# Altium PCB PWR612A.PcbDoc (part 1 of 2)
Units mil, origin at the board's own origin, x right, y up, seen from the top; angles counter-clockwise.
Board outline 6150 x 4600 mil, 4 copper layers (Top Layer, MidLayer1, MidLayer2, Bottom Layer), stack 91.2 mil thick; 131 components, 120 nets, 496 pads, 150 vias.
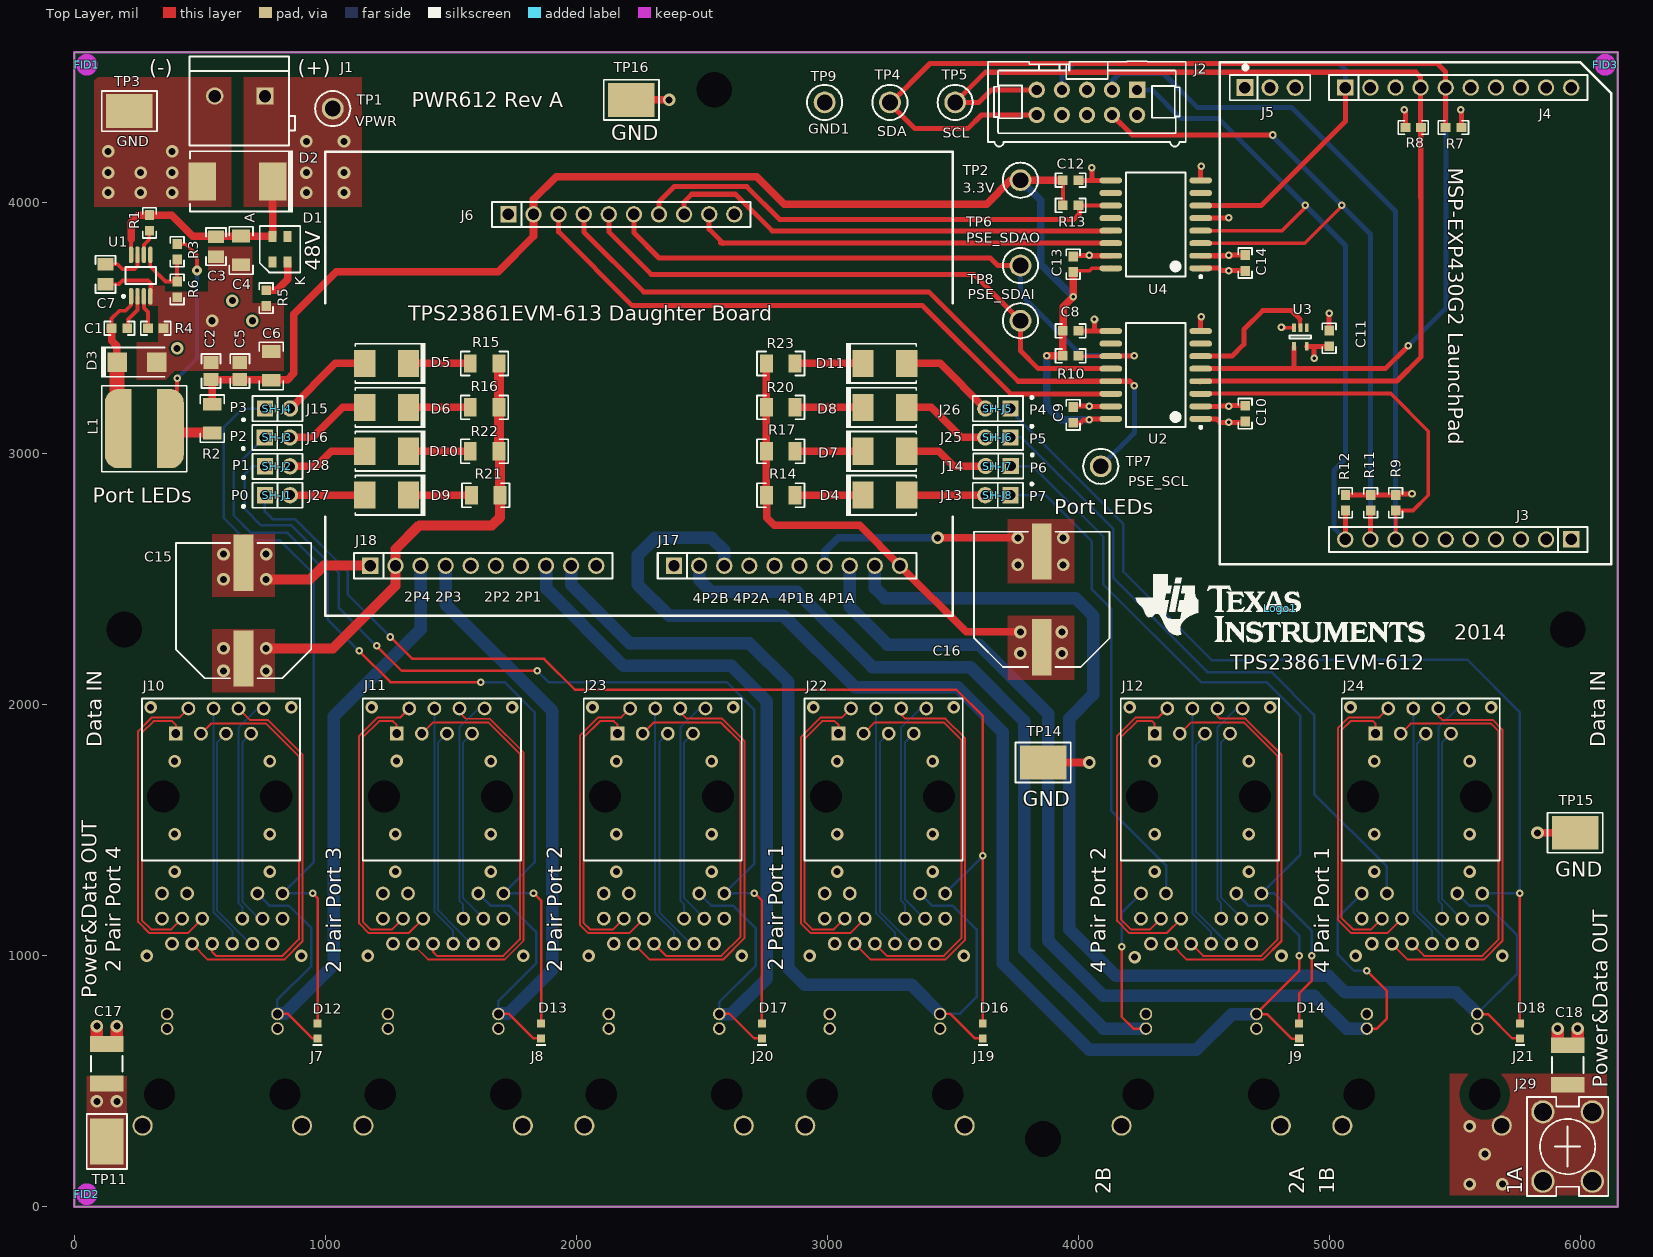
[diagram p0: Top Layer view]
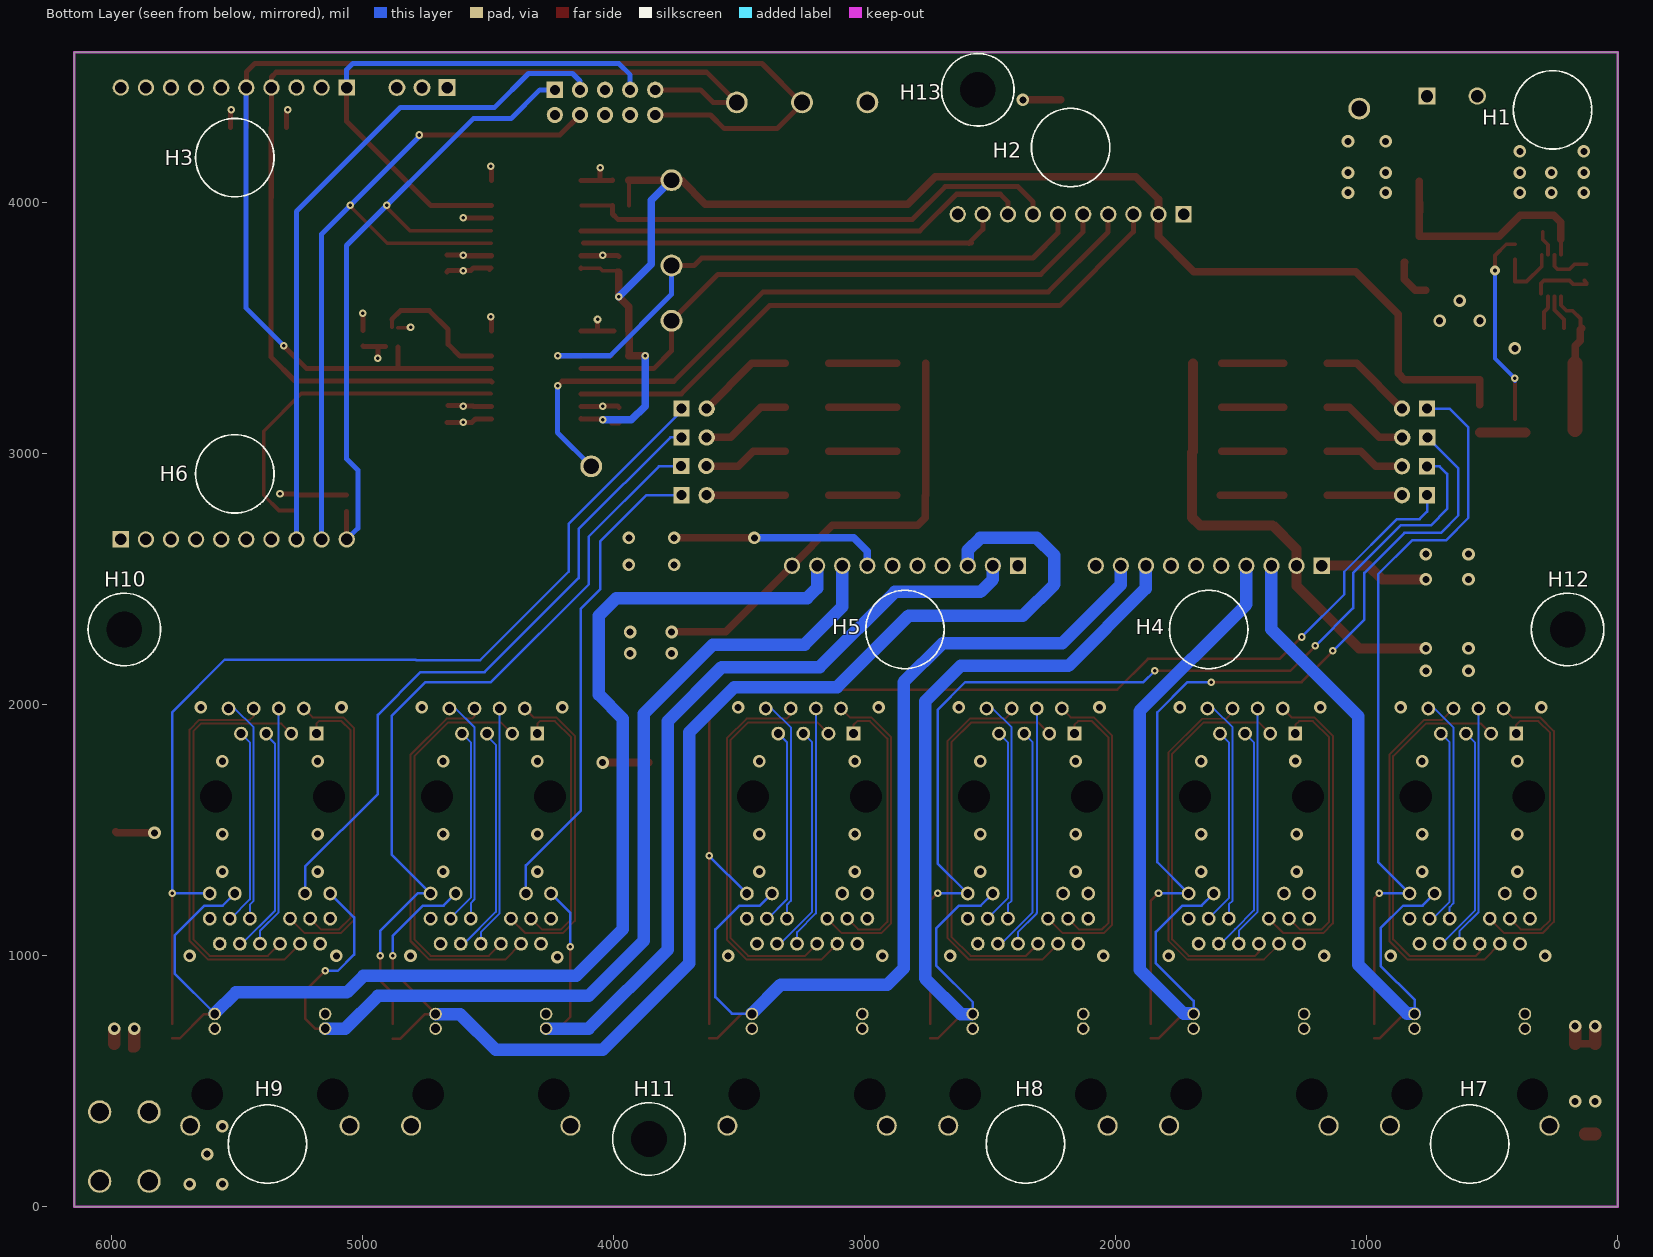
[diagram p1: Bottom Layer view, seen from below]
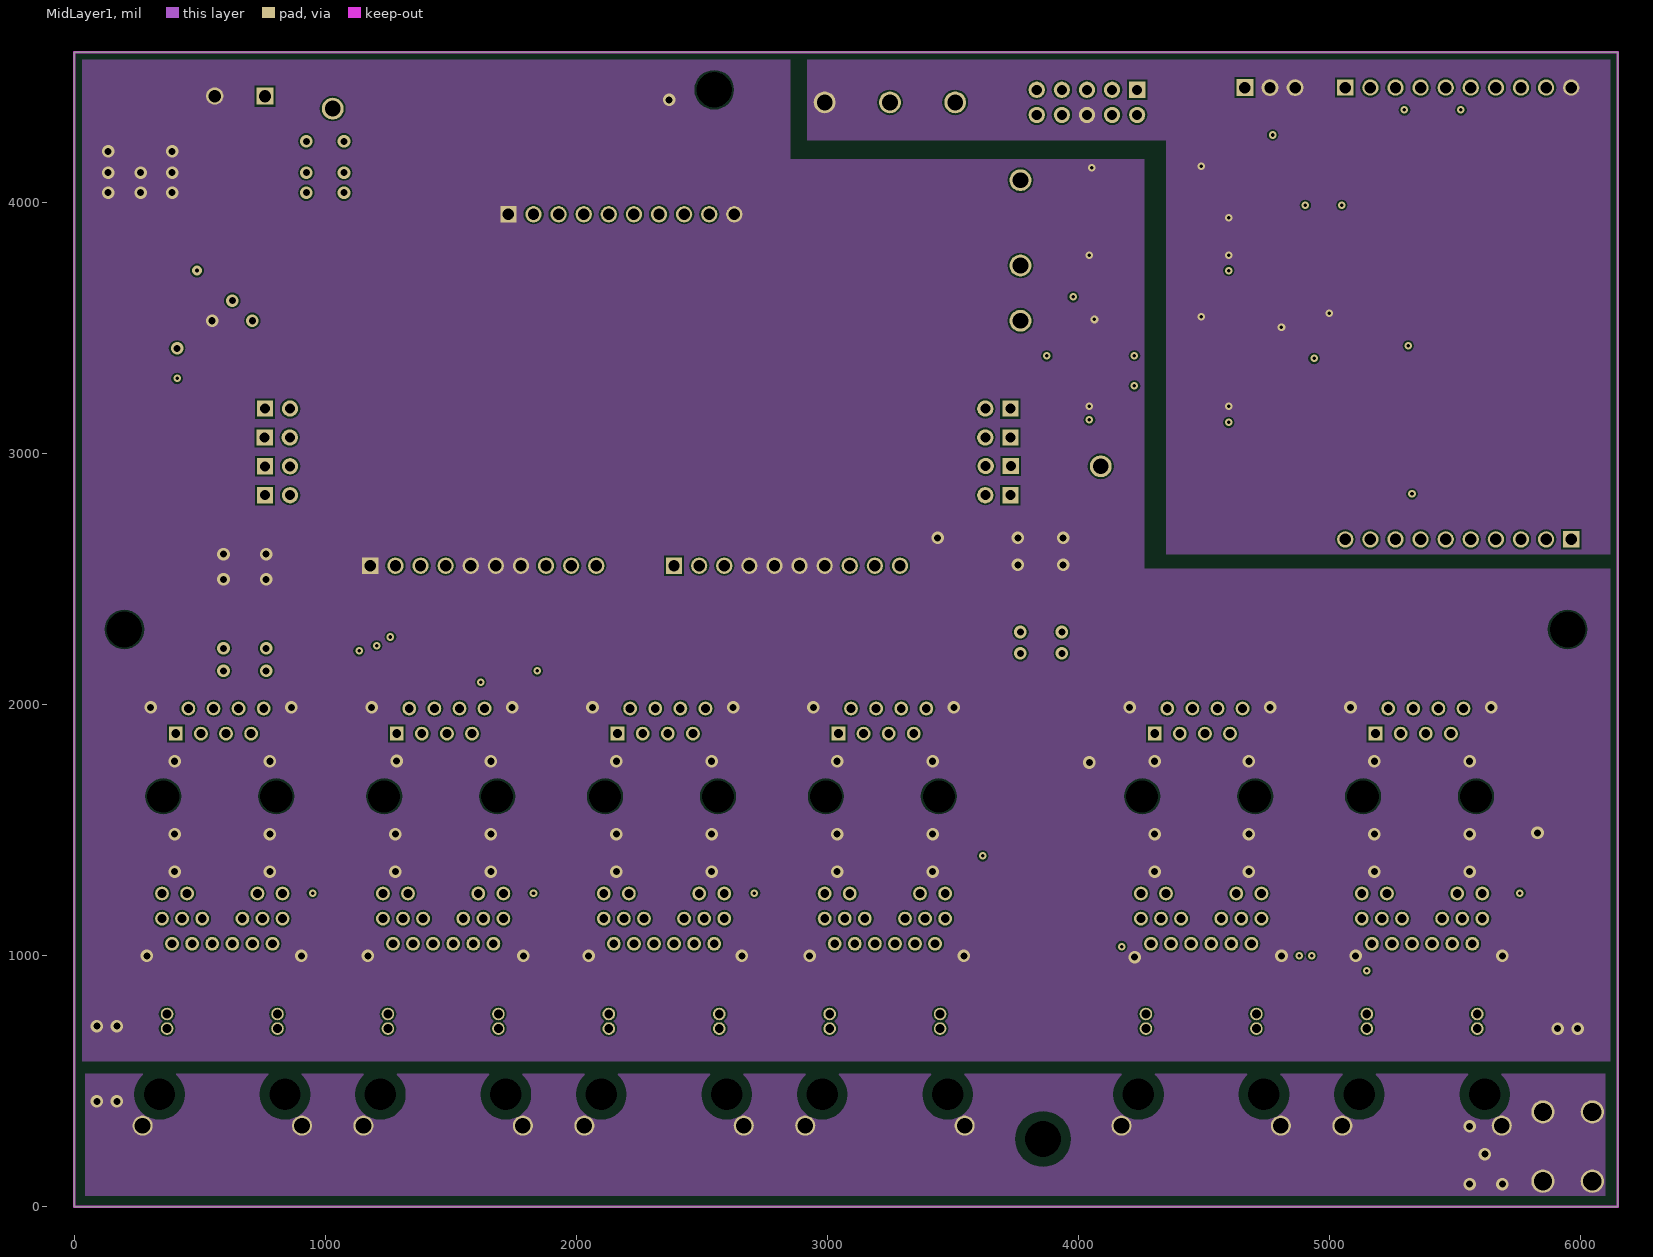
[diagram p2: MidLayer1]
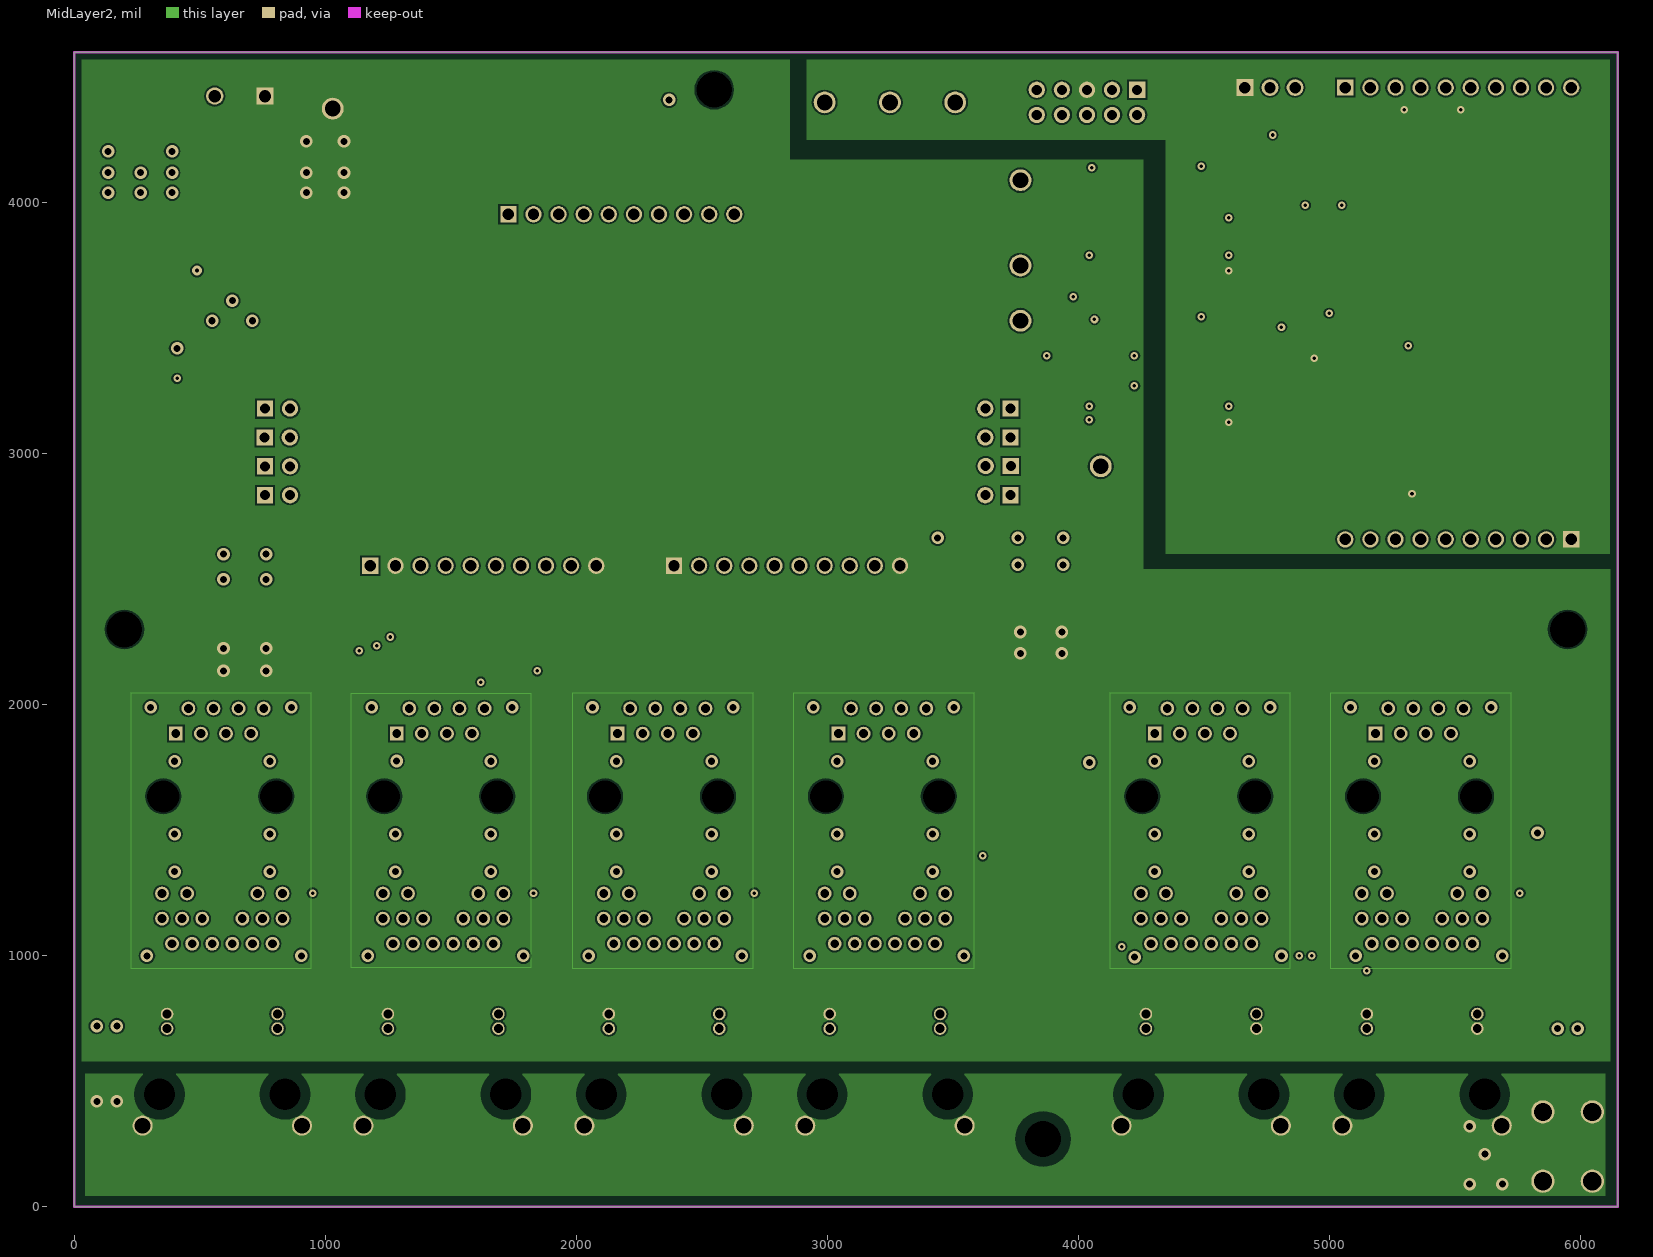
[diagram p3: MidLayer2]

## Layer stack, top to bottom
Top Layer: signal copper 2
Dielectric: core 59.2, FR-4, Dk 4.8
MidLayer1: signal copper 1.4
Dielectric: prepreg 12.6, FR-4, Dk 4.8
MidLayer2: signal copper 1.4
Dielectric: core 12.6, FR-4, Dk 4.8
Bottom Layer: signal copper 2

## Board outline
0,0 0,4600 6150,4600 6150,0 0,0

## Design rules (kind name [scope] priority, off if disabled: settings)
AcuteAngle [All] p1: minimum=4.50000000000000E+0001 checktracksonly=FALSE
AssemblyTestPointUsage [All] p1: valid=2
Clearance "Schematic Clearance Constraint" [InNet('EARTH')] p1: gap=39
Clearance Clearance_24 [InNamedPolygon('GND-Top-C9')] p2: gap=15
Clearance Clearance_23 [InNamedPolygon('VPWR-Top-C9')] p3: gap=15
Clearance Clearance_22 [InNamedPolygon('GND-Top-C21')] p4: gap=15
Clearance Clearance_21 [InNamedPolygon('VPWR-Top-C21')] p5: gap=15
Clearance Clearance_20 [InNamedPolygon('GND-Mid1')] p6: gap=15
Clearance Clearance_19 [InNamedPolygon('VPWR-C9')] p7: gap=15
Clearance Clearance_18 [InNamedPolygon('GND-C9')] p8: gap=15
Clearance Clearance_17 [InNamedPolygon('VPWR-C21')] p9: gap=15
Clearance Clearance_16 [InNamedPolygon('GND-C21')] p10: gap=15
Clearance Clearance_15 [InNamedPolygon('GND-Mid2-Port5&4')] p11: gap=15
Clearance Clearance_14 [InNamedPolygon('GND-Mid2-Port7&6')] p12: gap=15
Clearance Clearance_13 [InNamedPolygon('GND-Mid2-Port0')] p13: gap=15
Clearance Clearance_12 [InNamedPolygon('GND-Mid2-Port1')] p14: gap=15
Clearance Clearance_11 [InNamedPolygon('GND-Mid2-Port2')] p15: gap=15
Clearance Clearance_10 [InNamedPolygon('GND-Mid2-Port2')] p16: gap=15
Clearance Clearance_9 [InNamedPolygon('GND-Mid2-Port3')] p17: gap=15
Clearance Clearance_8 [InNamedPolygon('VPWR-Mid2')] p18: gap=15
Clearance Clearance_7 [InNamedPolygon('GND-Mid1')] p19: gap=15
Clearance Clearance_6 [InNamedPolygon('GND-Mid2')] p20: gap=15
Clearance Clearance_5 [InNamedPolygon('VPWR-Mid1')] p21: gap=20
Clearance Clearance_4 [InNamedPolygon('GND-Bottom')] p22: gap=15
Clearance Clearance_3 [InNamedPolygon('VPWR-Top')] p23: gap=15
Clearance Clearance_2 [InNamedPolygon('GND-Top')] p24: gap=15
Clearance Clearance_1 [InNamedPolygon('VPWR-Top')] p25: gap=15
Clearance Clearance_BoardEdge_MountingHoles [OnCopper and InComponentClass('Mounting Holes') vs IsKeepOut] p26: gap=40
Clearance Clearance_BoardEdge_Poly [OnCopper and InPoly vs IsKeepOut] p27: gap=25
Clearance Clearance_BoardEdge [OnCopper and InPoly vs IsKeepOut] p28: gap=25
Clearance [All] p29: gap=7
ComponentClearance ComponentClearance_Bumpon [(InComponentClass('Bumpon'))] p1: gap=0 collisioncheckmode=3 verticalgap=0 showdistances=FALSE
ComponentClearance ComponentClearance_Shunt [(InComponentClass('Shunt')) vs (InComponentClass('Header'))] p2: gap=0 collisioncheckmode=3 verticalgap=0 showdistances=FALSE
ComponentClearance ComponentClearance_Logo [InComponentClass(Logo)] p3 off: gap=0 collisioncheckmode=3 verticalgap=10 showdistances=FALSE
ComponentClearance ComponentClearance_ScrewToNut [(HasFootprint('NY PMS 440 0025 PH')) vs (HasFootprint('Keystone_1902C'))] p4: gap=5 collisioncheckmode=3 verticalgap=10 showdistances=FALSE
ComponentClearance ComponentClearance_MountingHoles [InComponentClass('Mounting Holes')] p5: gap=250 collisioncheckmode=3 verticalgap=100000 showdistances=FALSE
ComponentClearance ComponentClearance_SmallPassives [HasFootprint('0201*') or HasFootprint('0402*') or HasFootprint('0508') or HasFootprint('0603*') or HasFootprint('0612') or HasFootprint('0805*') or HasFootprint('0815*') or HasFootprint('0830*') or HasFootprint('1206*') or HasFootprint('1210*') or HasFootprint('1808*') or HasFootprint('1812*') or HasFootprint('1825*') or HasFootprint('2010*') or HasFootprint('2220*') or HasFootprint('2225*') or HasFootprint('2512*') or HasFootprint('2728*') or HasFootprint('3518*') vs HasFootprint('0201*') or HasFootprint('0402*') or HasFootprint('0508') or HasFootprint('0603*') or HasFootprint('0612') or HasFootprint('0805*') or HasFootprint('0815*') or HasFootprint('0830*') or HasFootprint('1206*') or HasFootprint('1210*') or HasFootprint('1808*') or HasFootprint('1812*') or HasFootprint('1825*') or HasFootprint('2010*') or HasFootprint('2220*') or HasFootprint('2225*') or HasFootprint('2512*') or HasFootprint('2728*') or HasFootprint('3518*')] p6: gap=10 collisioncheckmode=3 verticalgap=10 showdistances=FALSE
ComponentClearance ComponentClearance_THtoSMT [IsThruComponent vs IsSMTComponent] p7: gap=10 collisioncheckmode=3 verticalgap=100000 showdistances=FALSE
ComponentClearance ComponentClearance_THtoTH [IsThruComponent vs IsThruComponent] p8: gap=10 collisioncheckmode=3 verticalgap=100000 showdistances=FALSE
ComponentClearance [All] p9: gap=10 collisioncheckmode=3 verticalgap=10 showdistances=FALSE
DiffPairsRouting [All] p1: maxlimit=100 minlimit=5 mostfreqgap=10 toplayer_prefgap=7 midlayer1_mingap=10 midlayer2_mingap=10 bottomlayer_prefgap=7 maxuncoupledlength=1500
FabricationTestPointUsage TestPointUsage [All] p1: valid=2 allowmultiple=FALSE
FabricationTestpoint Testpoint [All] p1: side=3 testpointundercomponent=TRUE minsize=40 maxsize=100 preferedsize=60 minholesize=0 maxholesize=40 preferedholesize=32 testpointgrid=1 allowsidetop=TRUE allowsidebottom=TRUE usegrid=TRUE gridtolerance=0.01
FanoutControl Fanout_LCC [IsLCC] p1: bgadir=Out bgaviamode=Centered fanoutstyle=Auto fanoutdirection=Alternating viagrid=1 // Fanout_LCC (Default Rule)
FanoutControl Fanout_BGA [IsBGA] p2: bgadir=Out bgaviamode=Centered fanoutstyle=Auto fanoutdirection=Alternating viagrid=1 // Fanout_BGA (Default Rule)
FanoutControl Fanout_Default [All] p4: bgadir=Out bgaviamode=Centered fanoutstyle=Auto fanoutdirection=Alternating viagrid=1 // Fanout_Default (Default Rule)
FanoutControl Fanout_Small [(CompPinCount < 5)] p5: bgadir=Out bgaviamode=Centered fanoutstyle=Auto fanoutdirection=OutThenIn viagrid=1 // Fanout_Small (Default Rule)
HoleSize [All] p1: absolutevalues=TRUE maxlimit=251 minlimit=7 maxpercent=80.000 minpercent=20.000
MatchedLengths [InDifferentialPair ('PORT0_DATE1')] p1: tolerance=1000 checknetsindiffpair=TRUE checkdiffpairvsdiffpair=TRUE checkothers=TRUE
MinimumAnnularRing [All] p1: minimumring=5
MinimumSolderMaskSliver MinimumSolderMaskSliver_Logo [InComponentClass('Logo') vs InComponentClass('Logo')] p1: minsoldermaskwidth=0.7
MinimumSolderMaskSliver [All] p2: minsoldermaskwidth=5
PlaneConnect [All] p1: planeconnectstyle=Direct reliefexpansion=10 reliefentries=4 reliefconductorwidth=10 reliefairgap=10
PolygonConnect [All] p1: connectstyle=Direct reliefconductorwidth=10 reliefentries=4 polygonreliefangle="90 Angle" airgapwidth=10
RoutingVias [All] p1: holewidth=16 width=34 viastyle="Through Hole" minholewidth=7 minwidth=18 maxholewidth=40 maxwidth=65
SMDToCorner [All] p1: distance=30000
SilkToSilkClearance [All] p1: silktosilkclearance=5
SilkscreenOverComponentPads [All] p1: minsilkscreentomaskgap=5
SolderMaskExpansion [All] p1: expansion=1
Width Width_1 [InDifferentialPair('PORT0_DATE1')] p1: maxlimit=10 minlimit=7 preferedwidth=10 toplayer_prefwidth=8 midlayer1_minwidth=10 midlayer2_minwidth=10 bottomlayer_prefwidth=8 minimp=50.000000 maximp=50.000000 favimp=50.000000
Width [All] p2: maxlimit=100 minlimit=6 preferedwidth=30 toplayer_prefwidth=15 midlayer1_prefwidth=10 bottomlayer_prefwidth=8 minimp=50.000000 maximp=50.000000 favimp=50.000000 checkconnectedcopper=TRUE
14 further rules are at their usual default settings.

## Classes and differential pairs
component class Logo: Logo1
component class FiducialMark: FID1 FID2 FID3
component class AssemblyNote: ZZ1 ZZ2 ZZ3
component class PWR612A_SH2: C15 C16 C17 C18 D4 D5 D6 D7 D8 D9 D10 D11 D12 D13 D14 D16 D17 D18 J7 J8 J9 J10 J11 J12 J13 J14 J15 J16 J17 J18 J19 J20 J21 J22 J23 J24 J25 J26 J27 J28 J29 R14 R15 R16 R17 R20 R21 R22 R23 SH-J1 SH-J2 SH-J3 SH-J4 SH-J5 SH-J6 SH-J7 SH-J8 TP11 TP15 TP16
component class PWR612A_SH1: C1 C2 C3 C4 C5 C6 C7 C8 C9 C10 C11 C12 C13 C14 D1 D2 D3 FID1 FID2 FID3 H1 H2 H3 H4 H5 H6 H7 H8 H9 H10 H11 H12 H13 J1 J2 J3 J4 J5 J6 L1 Logo1 R1 R2 R3 R4 R5 R6 R7 R8 R9 R10 R11 R12 R13 TP1 TP2 TP3 TP4 TP5 TP6 TP7 TP8 TP9 TP14 U1 U2 U3 U4 ZZ1 ZZ2 ZZ3
component class Shunt: SH-J1 SH-J2 SH-J3 SH-J4 SH-J5 SH-J6 SH-J7 SH-J8
component class Header: J13 J14 J15 J16 J25 J26 J27 J28
component class Bumpon: H1 H2 H3 H4 H5 H6 H7 H8 H9
differential pair PORT1_DATE4: +PORT1_DATE4_P -PORT1_DATE4_N
differential pair PORT1_DATE3: +PORT1_DATE3_P -PORT1_DATE3_N
differential pair PORT1_DATE2: +PORT1_DATE2_P -PORT1_DATE2_N
differential pair PORT1_DATE1: +PORT1_DATE1_P -PORT1_DATE1_N
differential pair PORT8&7_DATA4: +PORT8&7_DATA4_P -PORT8&7_DATA4_N
differential pair PORT8&7_DATA3: +PORT8&7_DATA3_P -PORT8&7_DATA3_N
differential pair PORT8&7_DATA2: +PORT8&7_DATA2_P -PORT8&7_DATA2_N
differential pair PORT8&7_DATA1: +PORT8&7_DATA1_P -PORT8&7_DATA1_N
differential pair PORT6&5_DATA4: +PORT6&5_DATA4_P -PORT6&5_DATA4_N
differential pair PORT6&5_DATA3: +PORT6&5_DATA3_P -PORT6&5_DATA3_N
differential pair PORT6&5_DATA2: +PORT6&5_DATA2_P -PORT6&5_DATA2_N
differential pair PORT6&5_DATA1: +PORT6&5_DATA1_P -PORT6&5_DATA1_N
differential pair PORT4_DATE4: +PORT4_DATE4_P -PORT4_DATE4_N
differential pair PORT4_DATE3: +PORT4_DATE3_P -PORT4_DATE3_N
differential pair PORT4_DATE2: +PORT4_DATE2_P -PORT4_DATE2_N
differential pair PORT4_DATE1: +PORT4_DATE1_P -PORT4_DATE1_N
differential pair PORT1_DATE1: +PORT2_DATE1_P -PORT2_DATE1_N
differential pair PORT1_DATE2: +PORT2_DATE2_P -PORT2_DATE2_N
differential pair PORT1_DATE3: +PORT2_DATE3_P -PORT2_DATE3_N
differential pair PORT1_DATE4: +PORT2_DATE4_P -PORT2_DATE4_N
differential pair PORT2_DATE1: +PORT3_DATE1_P -PORT3_DATE1_N
differential pair PORT2_DATE2: +PORT3_DATE2_P -PORT3_DATE2_N
differential pair PORT2_DATE3: +PORT3_DATE3_P -PORT3_DATE3_N
differential pair PORT2_DATE4: +PORT3_DATE4_P -PORT3_DATE4_N

## Components (designator, comment, footprint, x,y, rotation, side; value= is the part's Value field where it differs from the comment)
C1 "06031C103KAT2A" 0603 180,3500 r180 top
C2 "0805ZC105KAT2A" 0805 545,3330 r90 top
C3 "C2012X7R2A104K" 0805_HV 565,3825 r270 top
C4 "GRM31CR72A105KA01L" 1206 665,3810 r270 top
C5 "0805ZC105KAT2A" 0805 660,3330 r90 top
C6 "GRM31CR71A226KE15L" 1206 785,3350 r90 top
C7 "C2012X7R2A104K" 0805_HV 125,3715 r270 top
C8 "06031C103KAT2A" 0603 3970,3490 r180 top
C9 "06035C104KAT2A" 0603 3980,3155 r90 top
C10 "06035C104KAT2A" 0603 4665,3160 r90 top
C11 "06031C103KAT2A" 0603 5000,3460 r270 top
C12 "06031C103KAT2A" 0603 3970,4090 r180 top
C13 "06035C104KAT2A" 0603 3980,3755 r90 top
C14 "06035C104KAT2A" 0603 4665,3760 r90 top
C15 "EEV-FK2A470Q" SM_RADIAL_H13 675,2375 r90 top
C16 "EEV-FK2A470Q" SM_RADIAL_H13 3855,2420 r90 top
C17 "C4532X7R3D222K" 1812 130,570 r90 top
C18 "C4532X7R3D222K" 1812 5950,565 r90 top
D1 "LT E63C-CADB-35-L-Z" LED_PowerTOPLED_CB_lens 820,3815 r90 top
D2 "SMCJ58A-13-F" SMC 650,4085 r180 top
D3 "MURA110T3G" SMA 250,3365 r0 top
D4 "1SMB5933BT3G" SMB 3230,2835 r0 top
D5 "1SMB5933BT3G" SMB 1245,3360 r180 top
D6 "1SMB5933BT3G" SMB 1245,3185 r180 top
D7 "1SMB5933BT3G" SMB 3230,3010 r0 top
D8 "1SMB5933BT3G" SMB 3230,3185 r0 top
D9 "1SMB5933BT3G" SMB 1245,2835 r180 top
D10 "1SMB5933BT3G" SMB 1245,3010 r180 top
D11 "1SMB5933BT3G" SMB 3230,3360 r0 top
D12 "LB Q39G-L2N2-35-1" "LB Q39G_BLUE" 970,700 r270 top
D13 "LB Q39G-L2N2-35-1" "LB Q39G_BLUE" 1860,700 r270 top
D14 "LB Q39G-L2N2-35-1" "LB Q39G_BLUE" 4880,700 r270 top
D16 "LB Q39G-L2N2-35-1" "LB Q39G_BLUE" 3620,700 r270 top
D17 "LB Q39G-L2N2-35-1" "LB Q39G_BLUE" 2740,700 r270 top
D18 "LB Q39G-L2N2-35-1" "LB Q39G_BLUE" 5760,700 r270 top
FID1 "Fiducial" Fiducial10-20 50,4550 r90 top
FID2 "Fiducial" Fiducial10-20 50,50 r90 top
FID3 "Fiducial" Fiducial10-20 6100,4550 r90 top
H1 "SJ61A1" Bumpon_SJ61A1 260,4370 r180 bottom
H2 "SJ61A1" Bumpon_SJ61A1 2180,4220 r180 bottom
H3 "SJ61A1" Bumpon_SJ61A1 5510,4180 r180 bottom
H4 "SJ61A1" Bumpon_SJ61A1 1630,2300 r180 bottom
H5 "SJ61A1" Bumpon_SJ61A1 2840,2300 r180 bottom
H6 "SJ61A1" Bumpon_SJ61A1 5510,2920 r180 bottom
H7 "SJ61A1" Bumpon_SJ61A1 590,250 r180 bottom
H8 "SJ61A1" Bumpon_SJ61A1 2360,250 r180 bottom
H9 "SJ61A1" Bumpon_SJ61A1 5380,250 r180 bottom
H10 "4820" KEYSTONE_4820 5950,2300 r180 bottom
H11 "4820" KEYSTONE_4820 3860,270 r180 bottom
H12 "4820" KEYSTONE_4820 200,2300 r180 bottom
H13 "4820" KEYSTONE_4820 2550,4450 r180 bottom
J1 "Vin" CONN_ED120-2DS 660,4425 r90 top
J2 "N2510-6002-RB" CONN_2510-6002 4035,4400 r180 top
J3 "SSW-110-01-G-S" CONN_SSW-110-23-F-S 5964.14,2658.91 r0 top
J4 "SSW-110-01-G-S" CONN_SSW-110-23-F-S 5064.14,4458.91 r180 top
J5 "SSW-103-01-G-S" CONN_SSW-103-01-G-S 4764.14,4458.91 r180 top
J6 "SSW-110-01-G-S" CONN_SSW-110-23-F-S 1730,3954 r180 top
J7 "2 Pair Port 4" JK0-0177NL 590,710 r0 top
J8 "2 Pair Port 3" JK0-0177NL 1470,710 r0 top
J9 "4 Pair Port 2" JK0-0177NL 4490,710 r0 top
J10 "SS-7188V-A-NF" CONN_SS-7188V-A-NF 580,1635 r0 top
J11 "SS-7188V-A-NF" CONN_SS-7188V-A-NF 1460,1635 r0 top
J12 "SS-7188V-A-NF" CONN_SS-7188V-A-NF 4480,1635 r0 top
J13 "P7" TSW-102-07-G-S 3680,2835 r180 top
J14 "P6" TSW-102-07-G-S 3681.52,2951.14 r180 top
J15 "P3" TSW-102-07-G-S 810,3180 r0 top
J16 "P2" TSW-102-07-G-S 809,3065 r0 top
J17 "Port8&7&6&5" CONN_SSW-110-23-F-S 2390,2553.99 r180 top
J18 "Port4&3&2&1" CONN_SSW-110-23-F-S 1180,2554 r180 top
J19 "2 Pair Port 1" JK0-0177NL 3230,710 r0 top
J20 "2 Pair Port 2" JK0-0177NL 2350,710 r0 top
J21 "4 Pair Port 1" JK0-0177NL 5370,710 r0 top
J22 "SS-7188V-A-NF" CONN_SS-7188V-A-NF 3220,1635 r0 top
J23 "SS-7188V-A-NF" CONN_SS-7188V-A-NF 2340,1635 r0 top
J24 "SS-7188V-A-NF" CONN_SS-7188V-A-NF 5360,1635 r0 top
J25 "P5" TSW-102-07-G-S 3680,3065 r180 top
J26 "P4" TSW-102-07-G-S 3680,3180 r180 top
J27 "P0" TSW-102-07-G-S 810,2835 r0 top
J28 "P1" TSW-102-07-G-S 810,2950 r0 top
J29 "7693" 7693 5950,240 r0 top
L1 "SDR0805-820KL" SDR0805 279.5,3099.82 r0 top
Logo1 "Texas Instruments" TI_Stacked_Overlay_Medium 4805,2385 r0 top
R1 "CRCW0603200KFKEA" 0603 300,3920 r270 top
R2 "CRCW12061R00FKEA" 1206 550,3140 r90 top
R3 "CRCW06031K00FKEA" 0603 410,3805 r90 top
R4 "CRCW0603100KFKEA" 0603 325,3500 r180 top
R5 "CRCW060347K0JNEA" 0603 765,3620 r90 top
R6 "CRCW06033K16FKEA" 0603 410,3655 r90 top
R7 "CRCW060310K0FKEA" 0603 5495,4300 r0 top
R8 "CRCW060310K0FKEA" 0603 5335,4300 r180 top
R9 "CRCW060310K0FKEA" 0603 5265,2805 r90 top
R10 "CRCW06034K70JNEA" 0603 3970,3390 r180 top
R11 "CRCW060310K0FKEA" 0603 5165,2805 r90 top
R12 "CRCW060310K0FKEA" 0603 5065,2805 r90 top
R13 "CRCW06034K70JNEA" 0603 3970,3990 r180 top
R14 "CRCW12067K50FKEA" 1206 2815,2835 r0 top
R15 "CRCW12067K50FKEA" 1206 1635,3360 r180 top
R16 "CRCW12067K50FKEA" 1206 1635,3185 r180 top
R17 "CRCW12067K50FKEA" 1206 2815,3010 r0 top
R20 "CRCW12067K50FKEA" 1206 2815,3185 r0 top
R21 "CRCW12067K50FKEA" 1206 1640,2835 r180 top
R22 "CRCW12067K50FKEA" 1206 1635,3010 r180 top
R23 "CRCW12067K50FKEA" 1206 2815,3360 r0 top
SH-J1 "SPC02SYAN" SPC02SYAN 810,2835 r0 top
SH-J2 "SPC02SYAN" SPC02SYAN 810,2950 r0 top
SH-J3 "SPC02SYAN" SPC02SYAN 810,3065 r0 top
SH-J4 "SPC02SYAN" SPC02SYAN 810,3180 r0 top
SH-J5 "SPC02SYAN" SPC02SYAN 3680,3180 r0 top
SH-J6 "SPC02SYAN" SPC02SYAN 3680,3065 r0 top
SH-J7 "SPC02SYAN" SPC02SYAN 3680,2950 r0 top
SH-J8 "SPC02SYAN" SPC02SYAN 3680,2835 r0 top
TP1 "VPWR" Keystone5010 1030,4375 r90 top
TP2 "3.3V" Keystone5010 3770,4090 r0 top
TP3 "GND" Testpoint_Keystone_Compact 220,4365 r180 top
TP4 "SDA" Keystone5012 3250,4400 r0 top
TP5 "SCL" Keystone5012 3510,4400 r0 top
TP6 "PSE_SDAO" Keystone5012 3770,3750 r0 top
TP7 "PSE_SCL" Keystone5012 4090,2950 r0 top
TP8 "PSE_SDAI" Keystone5012 3770,3530 r90 top
TP9 "GND1" Keystone5011 2990,4400 r90 top
TP11 "GND" Testpoint_Keystone_Compact 130,260 r90 top
TP14 "GND" Testpoint_Keystone_Compact 3860,1770 r0 top
TP15 "GND" Testpoint_Keystone_Compact 5980,1490 r0 top
TP16 "GND" Testpoint_Keystone_Compact 2220,4410 r0 top
U1 "LM5007MM/NOPB" MUA08A_N 265,3710 r90 top
U2 "ISO7241CDW" DW0016A_N 4309.14,3313.91 r180 top
U3 "SN74LVC1G07DCK" DCK0005A_N 4885,3465 r270 top
U4 "ISO7241CDW" DW0016A_N 4309.14,3913.91 r180 top
ZZ1 "These assemblies are ESD sensitive, ESD precautions shall be observed." AssemblyNote 345,5780 r0 top
ZZ2 "These assemblies must be clean and free from flux and all contaminants. Use of no clean flux is not acceptable." AssemblyNote 345,5500 r0 top
ZZ3 "These assemblies must comply with workmanship standards IPC-A-610 Class 2., unless otherwise specified." AssemblyNote 345,5190 r0 top

## Footprints (in the part's own frame and the unit in brackets; to place one, negate y for a bottom-side part, rotate by r counter-clockwise, add the part's x,y. Pads: shape width x height; smd on the part's side, far side on the other; paste and mask are expansions set on the pad)
0603 [mm] "0603 from SM-752 data"
  rect 1x0.95 smd: 1(-0.8,0) 2(0.8,0)
  silkscreen extent -1.52,-0.69 1.52,0.69, body extent -0.87,-0.47 0.87,0.47, height 0.85
0805 [mm] "0805 from SM-752 data"
  rect 1.3x1.5 smd: 1(-0.85,0) 2(0.85,0)
  silkscreen extent -1.72,-0.97 1.72,0.97, body extent -1.1,-0.72 1.1,0.72, height 1.1
0805_HV [mil] "0805 with 30mil clearance between pads"
  rect 50x63 smd: 1(-40,0) 2(40,0)
  silkscreen extent -74,-40 74,40, body extent -43,-29 43,29, height 43
1206 [mm] "1206 from SM-752 data"
  rect 1.3x1.85 smd: 1(-1.45,0) 2(1.45,0)
  silkscreen extent -2.4,-1.21 2.4,1.21, body extent -1.7,-0.9 1.7,0.9, height 1.35
1812 [mm]
  rect 1.6x3.4 smd: 1(-2,0) 2(2,0)
  silkscreen extent -0.8,-1.6 0.8,1.6, body extent -2.4,-1.7 2.4,1.7, height 1.35
7693 [mm] "Keystone Electronics 7693 recommended land pattern"
  round 2.35 hole 1.85: 1(-2.502,3.505) 2(2.502,3.505) 3(-2.502,-3.505) 4(2.502,-3.505)
  silkscreen extent -4.11,-5 4.11,5, body extent -3.95,-3.94 3.95,3.96, height 8.86
AssemblyNote [mil] "Assembly Note"
Bumpon_SJ61A1 [mil] "3M Cylindrical Bumpon black"
  round 1 on Mech4: 0(0,0)
  silkscreen extent -156,-156 156,156, body extent -156,-155 156,156, height 201
CONN_2510-6002 [mm] "3M 2500 series TS-0770-L December 15, 2011"
  rect 1.65x1.65 hole 1.016 mask+0: 1(-5.08,-1.27)
  round 1.65 hole 1.016 mask+0: 2(-5.08,1.27) 3(-2.54,-1.27) 4(-2.54,1.27) 5(0,-1.27) 6(0,1.27) 7(2.54,-1.27) 8(2.54,1.27) 9(5.08,-1.27) 10(5.08,1.27)
  silkscreen extent -10.01,-4.17 10.01,4.47, body extent -10.01,-4.11 10.01,4.52, height 9.92
CONN_ED120-2DS [mm] "ONSHORE"
  rect 1.75x1.75 hole 1.25: 1(0,-2.54)
  round 1.75 hole 1.25: 2(0,2.54)
  silkscreen extent -5,-5.6 4,5.12, body extent -5,-5.6 4.15,5.12, height 13.1
CONN_SS-7188V-A-NF [mm] "Connector; PCB Jack, Thru-Hole; 1-Port, 8 Pos, Unshielded"
  rect 1.4x1.4 hole 0.89: 1(-4.445,6.35)
  round 1.4 hole 0.89: 2(-3.175,8.89) 3(-1.905,6.35) 4(-0.635,8.89) 5(0.635,6.35) 6(1.905,8.89) 7(3.175,6.35) 8(4.445,8.89)
  round 1.524 hole 3.251 unplated: MH1(-5.715,0) MH2(5.715,0)
  silkscreen extent -7.87,-6.48 8.13,9.91, body extent -7.75,-6.35 8,9.78, height 13.34
CONN_SSW-103-01-G-S [mm] "SAMTEC"
  rect 1.7x1.7 hole 1.15: 1(2.54,0)
  round 1.7 hole 1.15: 2(0,0) 3(-2.54,0)
  silkscreen extent -4.06,-2.23 4.06,1.27, body extent -4,-1.2 4,1.2, height 8.51
CONN_SSW-110-23-F-S [mm] "SAMTEC"
  rect 1.65x1.65 hole 1.15: 1(0,0)
  round 1.65 hole 1.15: 2(-2.54,0) 3(-5.08,0) 4(-7.62,0) 5(-10.16,0) 6(-12.7,0) 7(-15.24,0) 8(-17.78,0) 9(-20.32,0) 10(-22.86,0)
  silkscreen extent -24.51,-1.27 1.65,1.27, body extent -24.43,-1.27 1.57,1.27, height 8.59
DCK0005A_N [mm] "SOT353, 5-Leads, Body 2x1.3mm, Pitch 0.65mm, Lead Span 2.1mm, IPC Medium Density"
  rect 0.85x0.4 smd: 1(-0.95,0.65) 2(-0.95,0) 3(-0.95,-0.65) 4(0.95,-0.65) 5(0.95,0.65)
  silkscreen extent -0.15,-1.1 0.15,1.1, body extent -1.14,-1 1.14,1, height 0.94
DW0016A_N [mm] "SOIC, 16-Leads, Body 10.3x7.5mm, Pitch 1.27mm, IPC Medium Density"
  oval 2.3x0.6 smd: 1(-4.55,4.445) 2(-4.55,3.175) 3(-4.55,1.905) 4(-4.55,0.635) 5(-4.55,-0.635) 6(-4.55,-1.905) 7(-4.55,-3.175) 8(-4.55,-4.445) 9(4.55,-4.445) 10(4.55,-3.175) 11(4.55,-1.905) 12(4.55,-0.635) 13(4.55,0.635) 14(4.55,1.905) 15(4.55,3.175) 16(4.55,4.445)
  silkscreen extent -4.67,-5.25 3,5.42, body extent -3.79,-5.25 3.8,5.25, height 2.64
Fiducial10-20 [mm]
  round 1 smd paste-0.5 mask+0.5: 1(0,0)
  Top Layer keep-out circle w1.178: c0,0 r0.5
JK0-0177NL [mil] "Pulse Engineering RJ-45 with integrated magnetics"
  round 55.12 hole 35: 1(200,338) 2(120,338) 3(40,338) 4(-40,338) 5(-120,338) 6(-200,338) 7(240,438) 8(160,438) 9(80,438) 10(-80,438) 11(-160,438) 12(-240,438) 13(240,538) 14(140,538) 15(-140,538) 16(-240,538)
  round 50 hole 35: 17(220,58) 18(-220,58) 19(220,0) 20(-220,0)
  round 80 hole 62.5: 21(317.5,-387) 22(-317.5,-387)
  round 0 hole 125 unplated mask+64: MH1(250,-262) MH2(-250,-262)
  body extent -386,-694 383,593, height 601
Keystone5010 [mil] "Keystone Multipurpose loops"
  round 87 hole 63: 1(0,0)
  silkscreen extent -70,-70 70,70, body extent -63,-63 63,62, height 319
Keystone5011 [mil] "Keystone Multipurpose loops"
  round 87 hole 63: 1(0,0)
  silkscreen extent -70,-70 70,70, body extent -63,-63 63,62, height 319
Keystone5012 [mil] "Keystone Multipurpose loops"
  round 87 hole 63: 1(0,0)
  silkscreen extent -70,-70 70,70, body extent -63,-63 63,62, height 319
KEYSTONE_4820 [mm] "HEX NYLON STANDOFF 6-32, M-F 1\""
  round 0.025 on Mech4: 0(0,0)
  round 1 hole 3.6 unplated: MH(0,0)
  silkscreen extent -3.67,-3.67 3.67,3.67, body extent -3.67,-3.17 3.67,3.18, height 25.42
"LB Q39G_BLUE" [mm] "OSRAM"
  rect 0.8x0.8 smd: 1(-0.75,0) 2(0.75,0)
  silkscreen extent 1.3,-0.5 1.53,0.5, body extent -0.85,-0.45 0.85,0.45, height 0.4
LED_PowerTOPLED_CB_lens [mm] "Osram recommended land pattern,  \"LB_LT_LV_E63C_Pb_free.pdf\", dated 2006-04-13"
  rect 1.1x0.8 smd: 1(-1.3,0.75) 2(-1.3,-0.75) 3(1.3,-0.75) 4(1.3,0.75)
  silkscreen extent -2.35,-2.05 2.35,2.05, body extent -1.7,-1.5 1.7,1.5, height 3.37
MUA08A_N [mm] "TSOP, 8-Leads, Body 3x3mm, Pitch 0.65mm, IPC Medium Density"
  oval 1.7x0.45 smd: 1(-2.1,0.975) 2(-2.1,0.325) 3(-2.1,-0.325) 4(-2.1,-0.975) 5(2.1,-0.975) 6(2.1,-0.325) 7(2.1,0.325) 8(2.1,0.975)
  silkscreen extent -2.22,-1.55 0.85,1.87, body extent -1.6,-1.6 1.6,1.6, height 1.09
SDR0805 [mm] "Bourns recommended land pattern"
  oval 2.7x8 smd: 1(-2.65,0) 2(2.65,0)
  rect 1.5x1.5 smd: 1(-2.05,-3.25) 1(-2.05,3.25) 2(2.05,-3.25) 2(2.05,3.25)
  silkscreen extent -4.3,-4.35 4.3,4.35, body extent -3.88,-3.9 3.89,3.89, height 5.3
SM_RADIAL_H13 [mm] "12.5 x 13.5mm:  Panasonic H13"
  rect 5.7x2 smd: 1(-4.85,0) 2(4.85,0)
  silkscreen extent -6.85,-6.85 6.85,6.85, body extent -6.85,-6.85 6.85,6.85, height 14
SMA [mm] "Molded Diode, 2-Leads, Body 4.3x2.6mm, IPC Medium Density, based on OnSemi component dimensions and land pattern"
  rect 2x2 smd: 1(-2,0) 2(2,0)
  silkscreen extent -3.66,-1.57 2.79,1.57, body extent -2.6,-1.3 2.6,1.3, height 2.42
SMB [mil] "Molded Diode, 2-Leads, Body 5.4x3.6mm, IPC Medium Density, based on OnSemi component dimensions"
  rect 85x107.99 smd: 1(-87.01,0) 2(87.01,0)
  silkscreen extent -155,-82 125,82, body extent -106,-71 106,71, height 91
SMC [mil] "Molded Diode, 2-Leads, Body 6.9x5.8mm, IPC Medium Density, based on OnSemi component dimensions and land patterns"
  rect 110x150 smd: 1(-140.49,0) 2(140.49,0)
  silkscreen extent -221,-124 189,123, body extent -156,-116 156,116, height 91
SPC02SYAN [mil] "SULLINS"
  round 1 on Mech3: 0(0,0)
  body extent -98,-47 99,47, height 256
Testpoint_Keystone_Compact [mil] "Compact SMT test point"
  rect 185x135 smd: 1(0,0)
  silkscreen extent -110,-80 110,80, body extent -75,-56 75,56, height 91
TI_Stacked_Overlay_Medium [mil]
  silkscreen extent -576,-136 576,134
TSW-102-07-G-S [mm] "Samtec 100mil, 1x2, 230 mil above insulator"
  rect 1.65x1.65 hole 1.016 mask+0: 1(-1.27,0)
  round 1.65 hole 1.016 mask+0: 2(1.27,0)
  silkscreen extent -3.57,-1.27 2.54,1.27, body extent -2.54,-1.27 2.54,1.27, height 8.38

## Part data
C1 C8 C11 C12: "CAP, CERM, 0.01uF, 100V, +/-10%, X7R, 0603"
C2 C5: "CAP, CERM, 1uF, 10V, +/-10%, X7R, 0805"
C3 C7: "CAP, CERM, 0.1uF, 100V, +/-10%, X7R, 0805"
C4: "CAP, CERM, 1uF, 100V, +/-10%, X7R, 1206"
C6: "CAP, CERM, 22uF, 10V, +/-10%, X7R, 1206"
C9 C10 C13 C14: "CAP, CERM, 0.1uF, 50V, +/-10%, X7R, 0603"
C15 C16: "CAP, AL, 47uF, 100V, +/-20%, 0.32 ohm, SMD"
C17 C18: "CAP, CERM, 2200pF, 2000V, +/-10%, X7R, 1812"
D1: "LED, Green, SMD"
D2: library part SMBJ58A-13-F, "Diode, TVS, Uni, 58V, 600W, SMB"
D3: library part MURA120T3G, "Diode, Ultrafast, 100V, 1A, SMA"
D4 D5 D6 D7 D8 D9 D10 D11: "Diode, Zener, 22V, 550mW, SMB"
D12 D13 D14 D16 D17 D18: "LED, Blue, SMD"
FID1 FID2 FID3: "Fiducial mark.  There is nothing to buy or mount."
H1 H2 H3 H4 H5 H6 H7 H8 H9: "Bumpon, Cylindrical, 0.312 X 0.200, Black"
H10 H11 H12 H13: "Standoff, Hex, 1\"L #6-32 Nylon, M-F"
J1: library part ED120/2DS, "TERMINAL BLOCK 5.08MM VERT 2POS"
J2: "Header (shrouded), 100mil, 5x2, High-Temperature, Gold, TH"
J3 J4 J6 J17 J18: library part SSW-110-23-F-S, "Connector, Receptacle, 100mil, 10x1, Gold plated, TH"
J5: "Receptacle 100mil 3x1, Gold, TH"
J7 J8 J9 J19 J20 J21: library part JK0-0177NL, "RJ-45 with integrated magnetics"
J10 J11 J12 J22 J23 J24: "RJ-45, Vertical, TH"
J13 J14 J15 J16 J25 J26 J27 J28: library part TSW-102-07-G-S, "Header, TH, 100mil, 2x1, Gold plated, 230 mil above insulator"
J29: "Terminal screw, vertical, snap-in"
L1: "Inductor, Drum Core, Ferrite, 82uH, 0.78A, 0.37 ohm, SMD"
Logo1: library part TI_Logo, "Texas Instrument Corporate Signature"
R1: "RES, 200k ohm, 1%, 0.1W, 0603"
R2: "RES, 1.00 ohm, 1%, 0.25W, 1206"
R3: "RES, 1.00k ohm, 1%, 0.1W, 0603"
R4: "RES, 100k ohm, 1%, 0.1W, 0603"
R5: "RES, 47k ohm, 5%, 0.1W, 0603"
R6: "RES, 3.16k ohm, 1%, 0.1W, 0603"
R7 R8 R9 R11 R12: "RES, 10.0k ohm, 1%, 0.1W, 0603"
R10 R13: "RES, 4.7k ohm, 5%, 0.1W, 0603"
R14 R15 R16 R17 R20 R21 R22 R23: "RES, 7.50k ohm, 1%, 0.25W, 1206"
SH-J1 SH-J2 SH-J3 SH-J4 SH-J5 SH-J6 SH-J7 SH-J8: "Shunt, 100mil, Flash Gold, Black"
TP1 TP2: library part 5010, "Test Point, Multipurpose, Red, TH"
TP3 TP11 TP14 TP15 TP16: library part 5016, "Test Point, Compact, SMT"
TP4 TP5 TP6 TP7 TP8: library part 5012, "Test Point, Multipurpose, White, TH"
TP9: library part 5011, "Test Point, Multipurpose, Black, TH"
U1: "High Voltage (80V) Step Down Switching Regulator, 8-pin MSOP, Pb-Free"
U2 U4: "25 Mbps Quad Channels, 3 / 1, Digital Isolator, 3.3 V / 5 V, -40 to +125 degC, 16-pin SOIC (DW), Green (RoHS & no Sb/Br)"
U3: "SINGLE BUFFER/DRIVER WITH OPEN-DRAIN OUTPUT, DCK0005A"
ZZ1 ZZ2 ZZ3: library part AssemblyNote

## Free pads (board coordinates)
  round 8 smd far side: StartPad(4650,1148)

## Via types
v1: diameter 50, hole 28, Top Layer to Bottom Layer, 108 vias
v2: diameter 30, hole 14, Top Layer to Bottom Layer, 41 vias
v3: diameter 40, hole 15, Top Layer to Bottom Layer, 1 vias

## Nets (pads, with @x,y where several pads share a name; then routed paths per layer and width w, separated by ;. In a path a pad name is that pad's centre, name@x,y a point inside that pad or via, vN(x,y) a via of type N, cw(c..) or ccw(c..) an arc to the next point about the centre after c; other vN are vias at no path point)
3.3V: C2.1 C5.1 C6.1 C8.2 C9.1 C12.2 C13.1 J6.2 R2.2 R10.2 R13.2 TP2.1 U2.16 U4.16 | length 6049
  Top Layer w15: R13.2@3939.14,3988.91 C12.2@3939.14,4088.91 ; C13.1@3989.14,3728.91 4045,3728.91 4055,3738.91 U4.16@4130,3738.91
  Top Layer w20: v2@3885.73,3388.91 R10.2@3939.14,3388.91 ; C9.1@3980,3123.5 4008.5,3123.5 4020,3135 v2(4045,3135) 4048.91,3138.91 U2.16@4130,3138.91 ; C13.1@3981.07,3722.44 C13.1@3987.55,3728.91 ; U2.16@4129.46,3139.46 U2.16@4130,3140 ; U4.16@4130,3738.91 U4.16@4130,3740
  Top Layer w30: R2.2@549.5,3195.14 C2.1@549.5,3295.46 ; C2.1@549.5,3295.14 850.14,3295.14 875,3320 875,3555 1045,3725 1689,3725 1830,3866 1830,4013.99 1920,4103.99 2720.01,4103.99 2829,3995 3635,3995 3730,4090 TP2.1@3770,4090 C12.2@3938.5,4090 C12.2@3940,4090 ; 3842.55,4088.91 C12.2@3939.14,4088.91 ; v2(3875,3390) R10.2@3938.5,3390 ; C8.2@3938.5,3490 3938.5,3391.5 R10.2@3940,3390 ; C8.2@3940,3490 3940,3585 v2(3980,3625) C13.1@3980,3723.5
  Bottom Layer w30: TP2.1@3775,4085 3850,4010 3850,3755 v2(3980,3625) ; v2(3875,3390) 3875,3190 3930,3135 v2(4045,3135)
3.3V_USB: C10.1 C11.2 C14.1 J2.5 J3.1 J5.1 R7.2 R8.2 R9.2 R11.2 R12.2 U2.1 U3.5 U4.1 | length 918.2
  Top Layer w20: U2.1@4488.27,3138.91 4551.09,3138.91 4565,3125 v2(4600,3125) C10.1@4665,3125 ; U4.1@4495,3735 4490,3740 4560,3740 4570,3730 v2(4600,3730) 4660,3730 C14.1@4665,3725 ; U3.5@4910.59,3427.6 4997.6,3427.6 C11.2@5000,3430 ; v2(4940,3380) 4940,3425 ; R12.2@5065,2836.5 5161.5,2836.5 R11.2@5165,2840 ; R11.2@5165,2836.5 5261.5,2836.5 R9.2@5265,2840 ; R9.2@5265,2835 5270,2840 v2(5330,2840) ; v2(5300,4370) 5303.5,4366.5 R8.2@5303.5,4300 ; v2(5525,4370) 5526.5,4368.5 R7.2@5526.5,4300
\INT: J2.7 J4.1 U4.6 | length 2143.5
  Top Layer w20: U4.6@4488.27,3988.91 4728.91,3988.91 5064.14,4324.14 J4.1@5064.14,4458.91
  Bottom Layer w20: J2.7@3935,4450 3935,4510 3980,4555 5040,4555 5065,4530 J4.1@5065,4455
\PSE_INT: J6.7 R13.1 U4.11 | length 1971.3
  Top Layer w15: R13.1@4005,3988.91 U4.11@4130,3988.91
  Top Layer w20: J6.7@2330,3954 2330,4003.99 2390,4063.99 2680.01,4063.99 2810,3934 3984,3934 4005,3955 R13.1@4005,3988.91
\PSE_RST: J6.3 U2.14 | length 2537.2
  Top Layer w20: J6.3@1930,3954 1930,3883.99 2223.99,3590 3380,3590 3731.09,3238.91 U2.14@4130,3238.91
\PSE_SHDN: J6.8 U4.13 | length 1822.7
  Top Layer w20: J6.8@2430,3954 2430,4003.99 2460,4033.99 2635,4033.99 2780.58,3888.41 U4.13@4130,3888.41
\RESET: J2.3 J3.8 R9.1 U2.3 | length 4203.8
  Top Layer w15: U2.3@4488.27,3238.91 U2.3@4490,3238.91 ; U2.3@4490,3240 5245,3240 5395,3090 5395,2835 5333.5,2773.5 R9.1@5265,2773.5 J3.8@5265,2660
  Bottom Layer w20: J2.3@4135,4450 4135,4485 4165,4515 4340,4515 4475,4380 4850,4380 5264.14,3965.86 J3.8@5264.14,2658.91
\SHDN: J2.1 J3.10 R12.1 U4.4 | length 2869.9
  Top Layer w15: U4.4@4488.27,3888.91 4812.55,3888.91 4905,3981.37 v2(4905,3990)
  Top Layer w20: J3.10@5064.14,2658.91 5064.14,2769.14 R12.1@5065,2770
  Bottom Layer w20: J2.1@4235,4450 4295,4450 4410,4335 4560,4335 5065,3830 5065,2980 5020,2935 5020,2703.05 J3.10@5064.14,2658.91
A3: J2.4 J3.9 R11.1 U4.3 | length 3185.3
  Top Layer w15: U4.3@4488.27,3838.91 4902.55,3838.91 5050,3986.37 v2(5050,3990)
  Top Layer w20: J2.4@4135,4350 4215,4270 v2(4775,4270) ; J3.9@5164.14,2658.91 5165,2659.78 R11.1@5165,2773.5
  Bottom Layer w20: v2@4772.5,4267.5 5164.14,3875.86 J3.9@5164.14,2658.91
EARTH: C17.1 C18.1 J7.21 J7.22 J8.21 J8.22 J9.21 J9.22 J19.21 J19.22 J20.21 J20.22 J21.21 J21.22 J29.1 J29.2 J29.3 J29.4 TP11.1 | length 40
  Top Layer w50: TP11.1@90,290 TP11.1@130,290
  other v1: 5560,90 5690,90 5620,210 5560,320 90,420 170,420
GND: C2.2 C3.2 C4.2 C5.2 C6.2 C7.2 C8.1 C9.2 C12.1 C13.2 C15.2 C16.2 C17.2 C18.2 D2.2 D3.2 J1.2 J6.1 J6.10 J17.4 J17.5 J17.6 J17.7 J18.1 J18.5 J18.6 J18.7 R4.1 R5.1 R6.1 TP3.1 TP14.1 TP15.1 TP16.1 U1.4 U2.9 U2.15 U4.9 U4.15 | length 3078.3
  Top Layer w15: C7.2@124.5,3681.73 C7.2@132.77,3690 ; C7.2@125,3675 177.17,3675 192.17,3690 295,3690 306.3,3678.7 U1.4@306.3,3638.73 ; C12.1@4005,4090 4055,4090
  Top Layer w20: C9.2@3980,3185 3985,3190 v2(4045,3190) 4046.09,3188.91 U2.15@4130,3188.91 ; C13.2@3980,3785 3985,3790 v2(4045,3790) ; C8.1@4000,3490 4001.09,3488.91 U2.9@4130,3488.91 ; C12.1@4005,4090 4006.09,4088.91 U4.9@4130,4088.91 ; v2@4050,3790 4051.09,3788.91 U4.15@4130,3788.91 ; 4055,4090 v2(4055,4140) ; 4065,3490 v2(4065,3535)
  Top Layer w30: C17.2@90,650 91.26,648.74 C17.2@130,648.74 ; C17.2@130,650 C17.2@170,650 ; TP16.1@2220,4410 v1(2370,4410) ; v1(3440,2665) v1(3760,2665) ; TP14.1@3860,1770 v1(4045,1770) ; v1(5830,1490) TP15.1@5980,1490 TP15.1@5985,1495 ; C18.2@5910,640 C18.2@5920,630
  Top Layer w40: v1(765,2500) 940,2500 994,2554 J18.1@1180,2554
  Top Layer w50: C17.2@90,650 v1(90,720) ; C17.2@170,650 v1(170,720) ; C18.2@5910,640 v1@5910,700 ; C18.2@5990,650 v1(5990,710)
  Bottom Layer w30: J17.7@2990,2553.99 2990,2611 3044,2665 v1(3440,2665)
  other v1: 5910,710 4225,995 290,1000 905,1000 1170,1000 1790,1000 2050,1000 2660,1000 2930,1000 3545,1000 4810,1000 5105,1000 5690,1000 400,1335 780,1335 1280,1335 1660,1335 2160,1335 2540,1335 3040,1335 3420,1335 4305,1335 4680,1335 5180,1335 5560,1335 400,1485 780,1485 1280,1485 1660,1485 2160,1485 2540,1485 3040,1485 3420,1485 4305,1485 4680,1485 5180,1485 5560,1485 400,1775 780,1775 1660,1775 2160,1775 2540,1775 3040,1775 3420,1775 4305,1775 4680,1775 5180,1775 5560,1775 1284.79,1776 305,1990 865,1990 1185,1990 1745,1990 2065,1990 2625,1990 2945,1990 3505,1990 4205,1990 4765,1990 5085,1990 5645,1990 595,2500 3760,2557.8 3940,2557.8 595,2600 765,2600 3940,2665 550,3530 135,4040 265,4040 390,4040 135,4120 265,4120 390,4120 135,4205 390,4205
GND1: C10.2 C11.1 C14.2 J2.6 J4.10 J5.2 J5.3 TP9.1 U2.2 U2.8 U3.3 U4.2 U4.5 U4.8 | length 686.1
  Top Layer w15: v2@4812.6,3502.4 U3.3@4859.41,3502.4
  Top Layer w20: U2.2@4488.27,3188.91 4560,3188.91 4561.09,3190 v2(4600,3190) 4601.5,3191.5 C10.2@4660,3191.5 ; U2.8@4488.27,3488.91 4488.27,3533.27 4490,3535 v2(4490,3545) ; U4.2@4488.27,3788.91 4582.55,3788.91 ; U4.5@4488.27,3938.91 4598.91,3938.91 v2(4600,3940) ; U4.8@4488.27,4088.91 4488.27,4143.27 v2(4490,4145) ; v2@4605,3785 4611.5,3791.5 C14.2@4665,3791.5 ; v2(4810,3505) v2@4812.6,3502.4 ; C11.1@5000,3491.5 v2(5000,3560)
  Bottom Layer w20: J5.2@4764.14,4458.91 J5.2@4764.14,4470.5
  other v2: 4600,3790
NetC1_1: C1.1 U1.2 | length 142.8
  Top Layer w15: C1.1@214.5,3500.14 214.5,3534.5 252.2,3572.2 U1.2@252.2,3627.32
NetC1_2: C1.2 D3.1 L1.1 U1.1 | length 588.7
  Top Layer w15: C1.2@148.5,3500 148.5,3538.5 180,3570 205,3570 226.61,3591.61 U1.1@226.61,3627.32
  Top Layer w30: C1.2@144.5,3500.14 150,3494.63 150,3450 170,3430 D3.1@170,3360
  Top Layer w50: D3.1@170,3360 D3.1@170.76,3359.24
  Top Layer w60: L1.1@170.76,3096.68 D3.1@170.76,3359.24
NetC7_1: C7.1 U1.7 | length 186
  Top Layer w15: C7.1@125,3755 172.17,3755 192.17,3735 240,3735 252.2,3747.2 U1.7@252.2,3792.68
NetD1_2: D1.2 R5.2 | length 172
  Top Layer w30: R5.2@765,3651.5 806.5,3651.5 850,3695 850,3763.35 D1.2@849.53,3763.82
NetD4_1: D4.1 R14.2 | length 270.9
  Top Layer w30: R14.2@2872.09,2835 D4.1@3142.99,2835
NetD4_2: D4.2 J13.2 | length 313
  Top Layer w30: D4.2@3317.01,2835 J13.2@3630,2835
NetD5_1: D5.1 R15.2 | length 245.9
  Top Layer w30: D5.1@1332.01,3360 R15.2@1577.91,3360
NetD5_2: D5.2 J15.2 | length 372.6
  Top Layer w30: J15.2@860,3180 1040,3360 D5.2@1157.99,3360
NetD6_1: D6.1 R16.2 | length 245.9
  Top Layer w30: D6.1@1332.01,3185 R16.2@1577.91,3185
NetD6_2: D6.2 J16.2 | length 348.7
  Top Layer w30: J16.2@859,3065 950,3065 1070,3185 D6.2@1157.99,3185
NetD7_1: D7.1 R17.2 | length 270.9
  Top Layer w30: R17.2@2872.09,3010 D7.1@3142.99,3010
NetD7_2: D7.2 J14.2 | length 338.9
  Top Layer w30: D7.2@3317.01,3010 3445,3010 3503.86,2951.14 J14.2@3631.52,2951.14
NetD8_1: D8.1 R20.2 | length 270.9
  Top Layer w30: R20.2@2872.09,3185 D8.1@3142.99,3185
NetD8_2: D8.2 J25.2 | length 362.7
  Top Layer w30: D8.2@3317.01,3185 3415,3185 3535,3065 J25.2@3630,3065
NetD9_1: D9.1 R21.2 | length 250.9
  Top Layer w30: D9.1@1332.01,2835 R21.2@1582.91,2835
NetD9_2: D9.2 J27.2 | length 298
  Top Layer w30: J27.2@860,2835 D9.2@1157.99,2835
NetD10_1: D10.1 R22.2 | length 245.9
  Top Layer w30: D10.1@1332.01,3010 R22.2@1577.91,3010
NetD10_2: D10.2 J28.2 | length 322.8
  Top Layer w30: J28.2@860,2950 965,2950 1025,3010 D10.2@1157.99,3010
NetD11_1: D11.1 R23.2 | length 270.9
  Top Layer w30: R23.2@2872.09,3360 D11.1@3142.99,3360
NetD11_2: D11.2 J26.2 | length 387.6
  Top Layer w30: D11.2@3317.01,3360 3450,3360 J26.2@3630,3180
NetD12_1: D12.1 J7.13 J15.1 | length 2981.8
  Top Layer w10: v2(950,1250) 970,1230 D12.1@970,729.53
  Bottom Layer w10: J15.1@760,3180 670,3180 595,3105 595,2745 685,2655 820,2655 955,2520 955,1373 J7.13@832,1250 ; J7.13@830,1248 J7.13@832,1250 ; J7.13@830,1250 J7.13@832,1250 ; v2(950,1250) J7.13@832,1250
NetD13_1: D13.1 J8.13 J16.1 | length 3421.6
  Top Layer w10: v2(1135,2215) 1260,2090 v2(1620,2090) ; v2(1830,1250) 1860,1220 D13.1@1860,729.53
  Bottom Layer w10: J16.1@759,3065 635,2941 635,2755 705,2685 850,2685 1010,2525 1010,2340 v2(1135,2215) ; v2(1620,2090) 1715,2090 1835,1970 1835,1373 J8.13@1712,1250 ; J8.13@1710,1248 J8.13@1712,1250 ; J8.13@1710,1250 J8.13@1712,1250 ; v2(1830,1250) J8.13@1712,1250